# Altium PCB master.PcbDoc
Units mil, origin at the board's own origin, x right, y up, seen from the top; angles counter-clockwise.
Board outline 1530.03 x 1950.03 mil, 2 copper layers (Top Layer, Bottom Layer); 28 components, 25 nets, 143 pads, 20 vias.
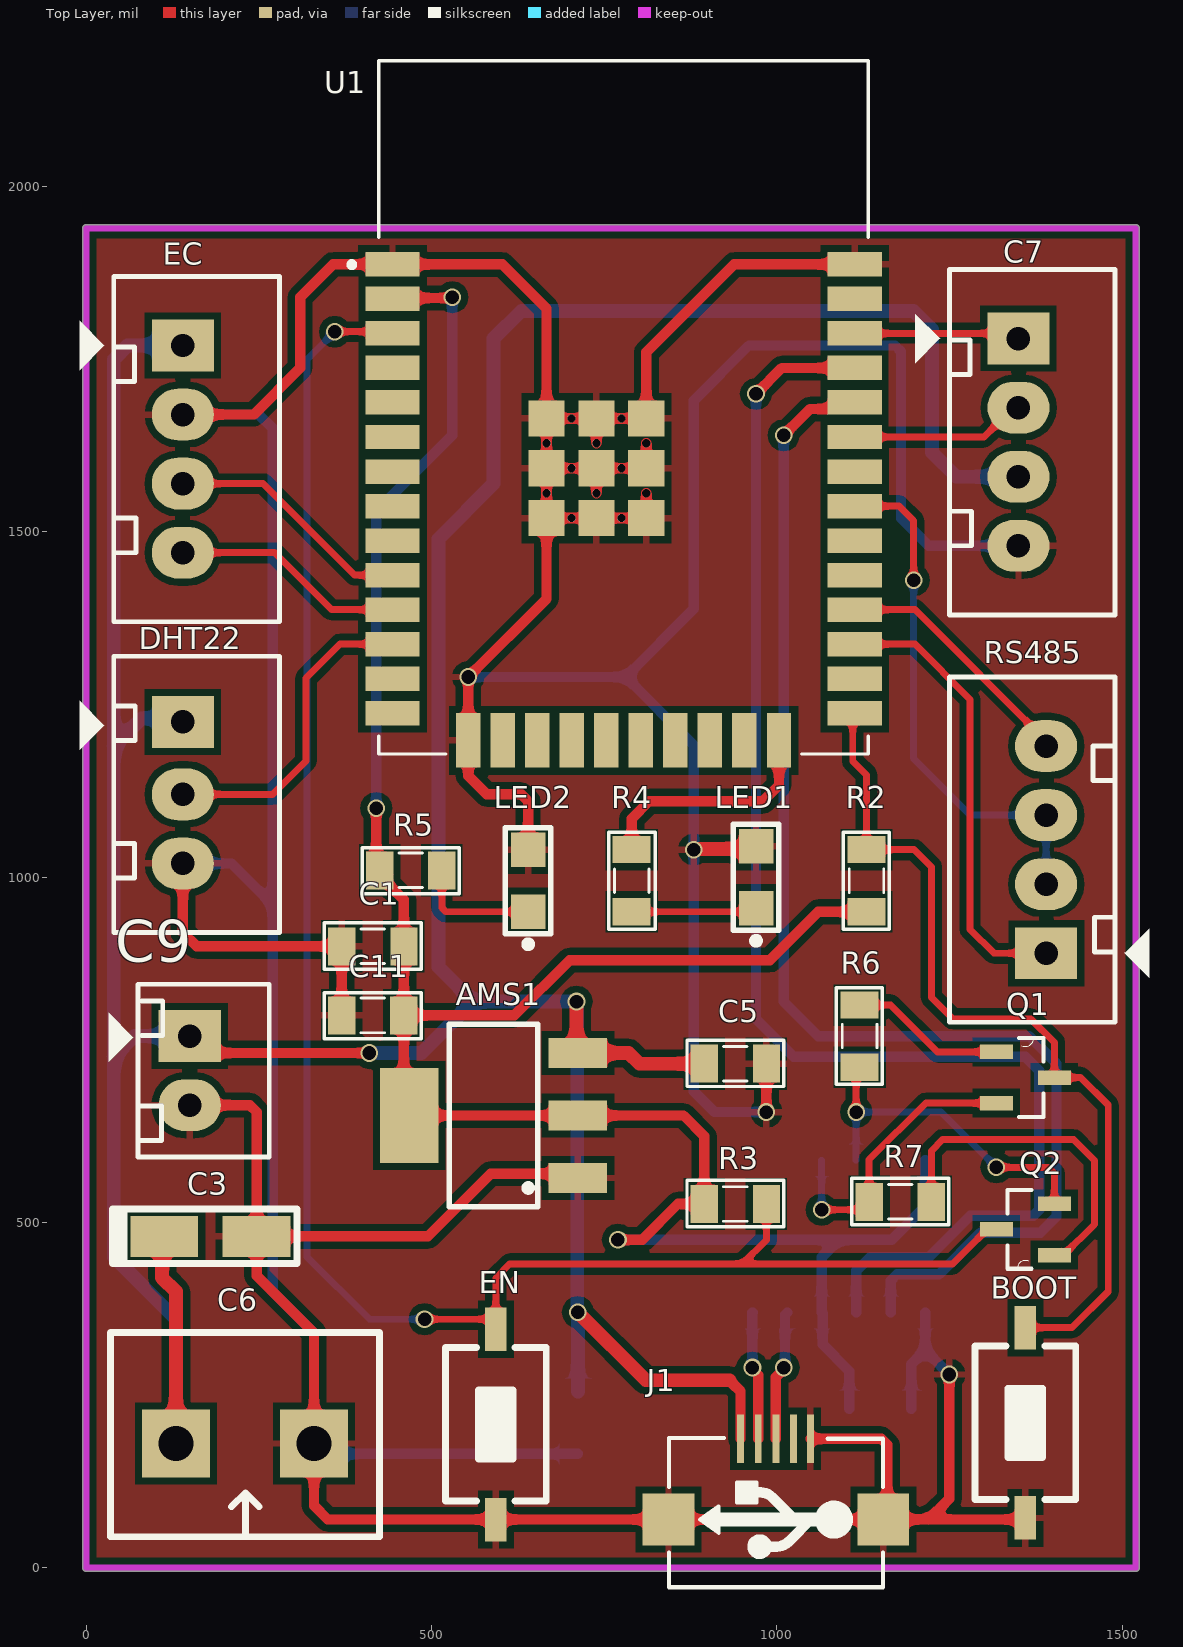
[diagram p0: Top Layer view]
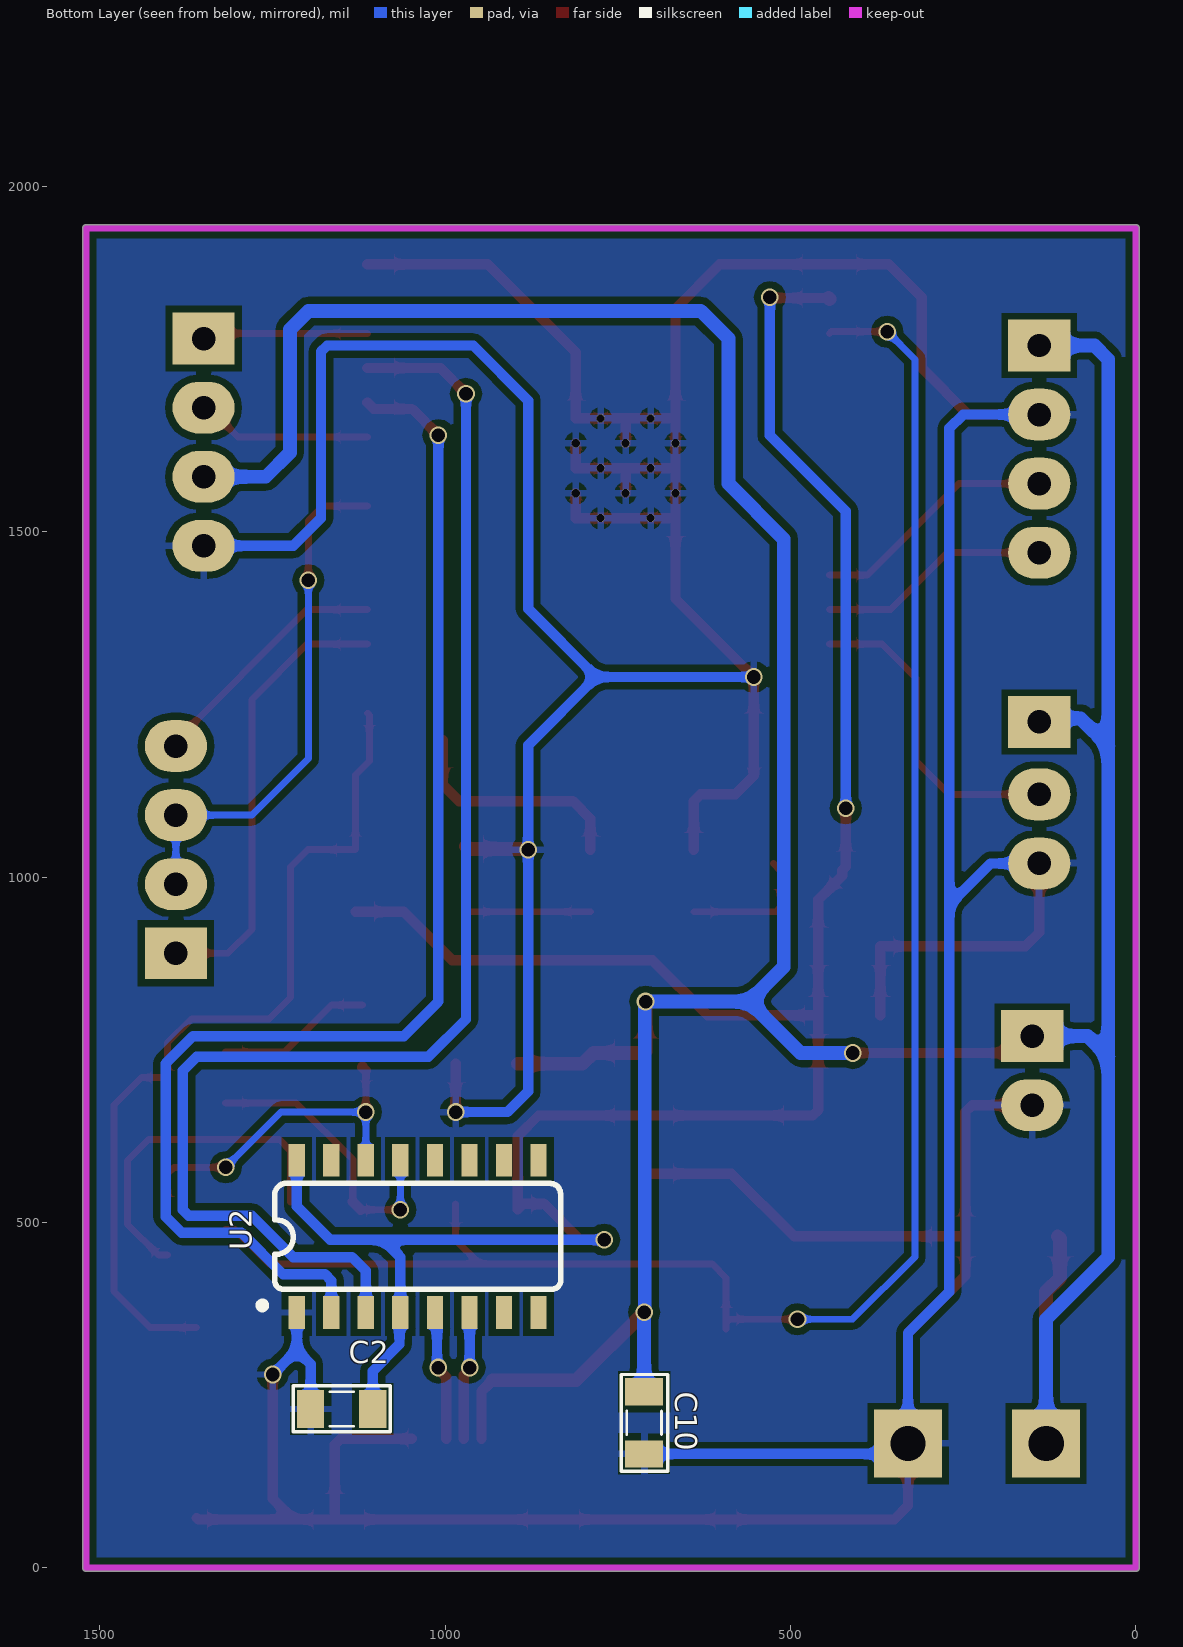
[diagram p1: Bottom Layer view, seen from below]
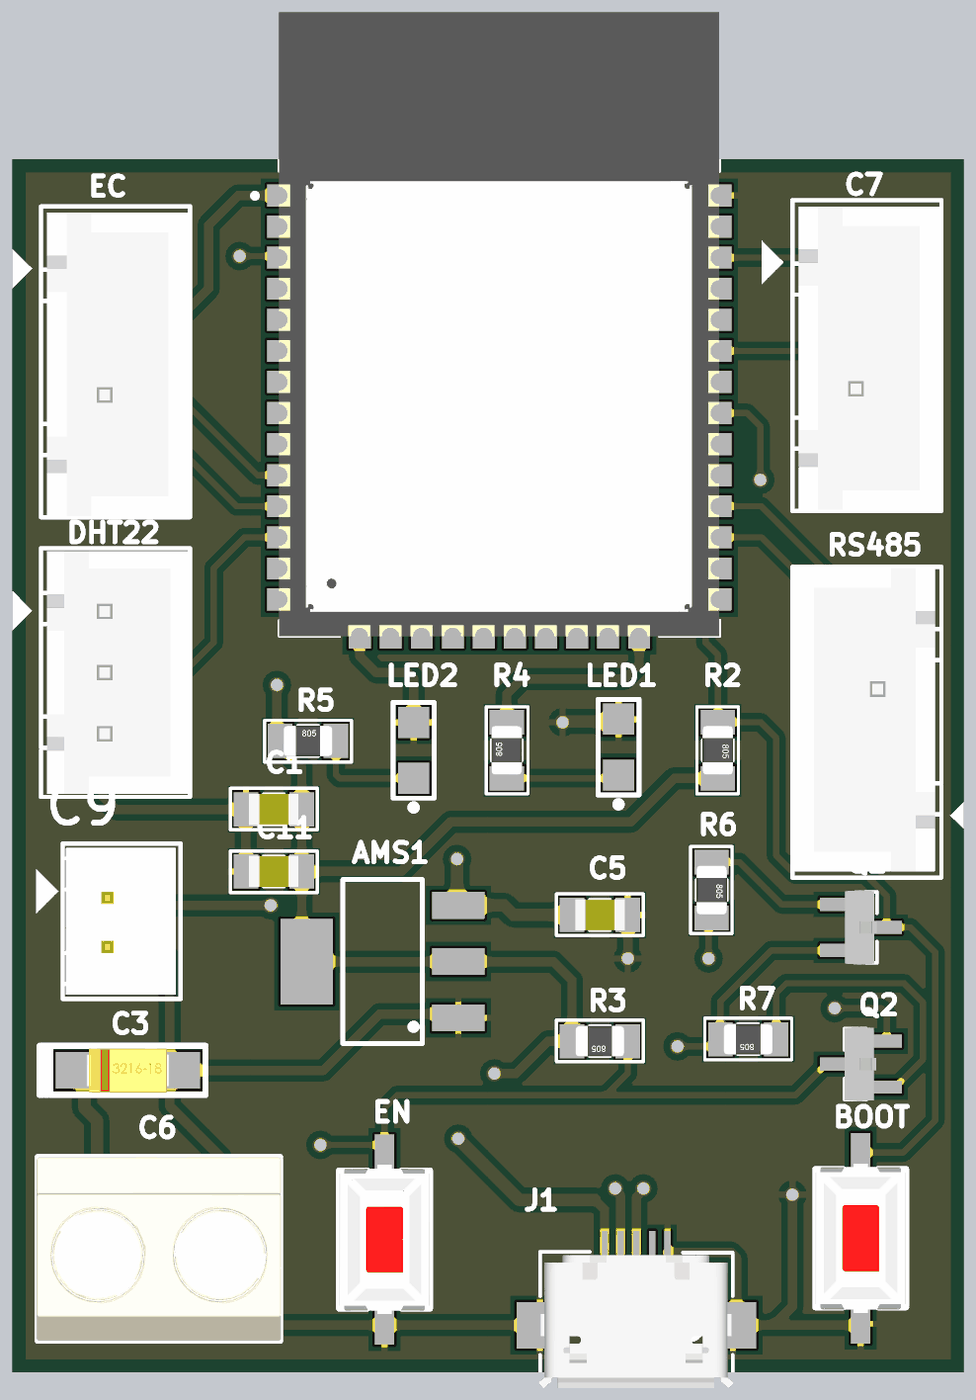
[diagram p2: 3D render of the assembled board from above, using the file's embedded part models]

## Layer stack, top to bottom
Top Solder: solder mask 0.4, Solder Resist, Dk 3.5
Top Layer: signal copper 1.4
Dielectric 1: dielectric 12.6, FR-4, Dk 4.8
Bottom Layer: signal copper 1.4
Bottom Solder: solder mask 0.4, Solder Resist, Dk 3.5

## Board outline
-5.01,0 ccw(c0,0) 0,-5.02 1520,-5.02 ccw(c1520,0) 1525.01,0 1525.01,1939.97 ccw(c1520,1940) 1525.01,1940 ccw(c1520,1940) 1520,1945.01 0,1945.01 ccw(c0,1940) -5.02,1940

## Design rules (kind name [scope] priority, off if disabled: settings)
Clearance [All] p1: gap=10 ignorepadtopadclearanceinfootprint=FALSE
DiffPairsRouting [All] p1: maxlimit=10 minlimit=10 mostfreqgap=10 toplayer_minwidth=15 toplayer_maxwidth=15 toplayer_prefwidth=15 bottomlayer_minwidth=15 bottomlayer_maxwidth=15 bottomlayer_prefwidth=15 maxuncoupledlength=500
PolygonConnect [All] p1: connectstyle=Relief reliefconductorwidth=10 reliefentries=4 polygonreliefangle="90 Angle" airgapwidth=10
RoutingVias [All] p1: holewidth=19.68 width=25.59 viastyle="Through Hole" minholewidth=19.68 minwidth=25.59 maxholewidth=19.68 maxwidth=25.59
SolderMaskExpansion [All] p1: expansion=4
Width [All] p1: maxlimit=20 minlimit=10 preferedwidth=15
29 further rules are at their usual default settings.

## Classes and differential pairs
component class "mach master": ESP32 rs485
differential pair D0: +D0_P -D0_N

## Components (designator, comment, footprint, x,y, rotation, side; value= is the part's Value field where it differs from the comment)
AMS1 "AMS1117-3.3V" SOT223 590,655 r90 top value="AMS1117-3.3V SOT223"
BOOT "SW" SW-SMD 1360,210 r270 top value="SW chip 2 pin"
C1 "100uF" CAP_0805 415,900 r180 top value=33p
C2 "10uF" CAP_0805 1150,230 r0 bottom value=33p
C3 "10uF" "tu tantalum smd3216" 180,480 r0 top
C5 "10uF" CAP_0805 940,730 r180 top value=33p
C6 "Header2" KF2-5.08 230,180 r180 top
C7 "Header4" Header4 1350,1780 r270 top
C9 "LED1" Header2 150,770 r270 top
C10 "100nF" CAP_0805 712.05,210 r90 bottom value=33p
C11 "100nF" CAP_0805 415,800 r0 top value=33p
DHT22 "J1" Header3 140,1220 r270 top value=J3
EC "C7" Header4 140,1770 r270 top
EN "SW" SW-SMD 593.25,207.8 r270 top value="SW chip 2 pin"
J1 "USB-5" USB-M1 998.76,186.84 r180 top
LED1 "LED3" LED0805 970,1000 r90 top
LED2 "LED3" LED0805 640,995 r90 top
Q1 "BC817" SOT95P240X97-3N 1360,710 r0 top
Q2 "BC817" SOT95P240X97-3N 1360,490 r180 top
R2 "10k" RES-SMD-0805 1130,995 r270 top
R3 "10k" RES-SMD-0805 940,527 r180 top
R4 "1k" RES-SMD-0805 790,995 r90 top
R5 "470" RES-SMD-0805 470,1010 r0 top
R6 "10k" RES-SMD-0805 1120,770 r270 top
R7 "10k" RES-SMD-0805 1178.84,530 r180 top
RS485 "C8" Header4 1390,890 r90 top (schematic designator rs485)
U1 "ESP32-WROOM-32" MODULE_ESP32-WROOM-32 778.25,1680.43 r0 top
U2 "CH340C" SOP-16 1040,480 r180 bottom

## Footprints (in the part's own frame and the unit in brackets; to place one, negate y for a bottom-side part, rotate by r counter-clockwise, add the part's x,y. Pads: shape width x height; smd on the part's side, far side on the other; paste and mask are expansions set on the pad)
CAP_0805 [mil]
  rect 39.37x55 smd: 1(-45,0) 2(45,0)
  silkscreen extent -70,-34 70,33, body extent -40,-25 40,25, height 24
Header2 [mil] "CON2"
  rect 75x90 hole 34: 1(0,0)
  oval 75x90 hole 34: 2(100,0)
  silkscreen extent -75,-118 175,115, body extent -68,-70 168,107, height 236
Header3 [mil] "CON 3"
  rect 75x90 hole 34: 1(-5,0)
  oval 75x90 hole 34: 2(100,0) 3(200,0)
  silkscreen extent -100,-150 300,140, body extent -95,-90 295,136, height 276
Header4 [mil] "CON4"
  rect 75x90 hole 34: 1(0,0)
  oval 75x90 hole 34: 2(100,0) 3(200,0) 4(300,0)
  silkscreen extent -100,-150 400,140, body extent -90,-90 398,136, height 276
KF2-5.08 [mm]
  rect 2.5x2.5 hole 1.3: 1(-2.54,0) 2(2.54,0)
  silkscreen extent -4.95,-4.08 4.95,3.43, body extent -5,-4.07 5,3.43, height 10
LED0805 [mil] "Chip Resistor; Body 2.0 x 1.3 mm (LxW typ)"
  rect 50x50 smd: 1(-45,0) 2(45,0)
  silkscreen extent -97,-33 77,33, body extent -60,-25 60,25, height 47
MODULE_ESP32-WROOM-32 [mm]
  rect 2x0.9 smd: 1(-8.5,5.26) 2(-8.5,3.99) 3(-8.5,2.72) 4(-8.5,1.45) 5(-8.5,0.18) 6(-8.5,-1.09) 7(-8.5,-2.36) 8(-8.5,-3.63) 9(-8.5,-4.9) 10(-8.5,-6.17) 11(-8.5,-7.44) 12(-8.5,-8.71) 13(-8.5,-9.98) 14(-8.5,-11.25) 25(8.5,-11.25) 26(8.5,-9.98) 27(8.5,-8.71) 28(8.5,-7.44) 29(8.5,-6.17) 30(8.5,-4.9) 31(8.5,-3.63) 32(8.5,-2.36) 33(8.5,-1.09) 34(8.5,0.18) 35(8.5,1.45) 36(8.5,2.72) 37(8.5,3.99) 38(8.5,5.26)
  rect 0.9x2 smd: 15(-5.715,-12.25) 16(-4.445,-12.25) 17(-3.175,-12.25) 18(-1.905,-12.25) 19(-0.635,-12.25) 20(0.635,-12.25) 21(1.905,-12.25) 22(3.175,-12.25) 23(4.445,-12.25) 24(5.715,-12.25)
  rect 1.33x1.33 smd: 39_1(-2.835,-0.405) 39_2(-1,-0.405) 39_3(0.835,-0.405) 39_4(-2.835,-2.24) 39_5(-1,-2.24) 39_6(0.835,-2.24) 39_7(-2.835,-4.075) 39_8(-1,-4.075) 39_9(0.835,-4.075)
  round 0.3 hole 0.3: 39_10(-1.917,-0.405) 39_11(-0.082,-0.405) 39_12(-2.835,-1.323) 39_13(-1,-1.323) 39_14(0.835,-1.323) 39_15(-1.917,-2.24) 39_16(-0.082,-2.24) 39_17(-2.835,-3.158) 39_18(-1,-3.158) 39_19(0.835,-3.158) 39_20(-1.917,-4.075) 39_21(-0.082,-4.075)
  silkscreen extent -10.1,-12.75 9,12.75, body extent -10.54,-12.75 8.98,12.75, height 3.2
RES-SMD-0805 [mil]
  rect 39.37x55 smd: 1(-45,0) 2(45,0)
  silkscreen extent -70,-34 70,33, body extent -39,-25 39,25, height 31
SOP-16 [mm]
  rect 0.6x1.2 smd: 1(-4.445,-2.8) 2(-3.175,-2.8) 3(-1.905,-2.8) 4(-0.635,-2.8) 5(0.635,-2.8) 6(1.905,-2.8) 7(3.175,-2.8) 8(4.445,-2.8) 9(4.445,2.8) 10(3.175,2.8) 11(1.905,2.8) 12(0.635,2.8) 13(-0.635,2.8) 14(-1.905,2.8) 15(-3.175,2.8) 16(-4.445,2.8)
  silkscreen extent -5.84,-2.67 5.26,1.95, body extent -4.95,-3.47 4.95,3.47, height 1.75
SOT95P240X97-3N [mil]
  rect 48x21 smd: 1(-42,37) 2(-42,-37) 3(42,0)
  silkscreen extent -9,-57 26,57, body extent -25,-60 26,60, height 79
SOT223 [mm] "SOT-223/SC-73; 4 Leads; Body 6.7 x 7.3 mm, inc. leads (LxW max)"
  rect 1.1x2.15 smd: 1(-2.3,-3.1) 2(0,-3.1) 3(2.3,-3.1)
  rect 3.5x2.15 smd: 4(0,3.1)
  silkscreen extent -3.35,-1.62 3.35,1.62, body extent -3.43,-1.65 3.43,1.65, height 2.54
SW-SMD [mm] "Switch SMD type"
  rect 1.6x0.8 smd: 1(-3.5,0) 2(3.5,0)
  silkscreen extent -2.82,-1.85 2.82,1.85, body extent -3.05,-1.85 3.05,1.85, height 2.5
"tu tantalum smd3216" [mm]
  rect 2.5x1.5 smd: 1(-1.7,0) 2(1.7,0)
  silkscreen extent -3.61,-1 3.17,1, body extent -1.7,-0.9 1.7,0.9, height 1.69
USB-M1 [mil]
  rect 10x70 smd: 1(51.18,0) 2(25.59,0) 3(0,0) 4(-25.59,0) 5(-50,0)
  rect 74.8x74.8 smd: 5(-155.51,116.84) 5(155.51,116.84)
  silkscreen extent -155,-1 155,215, body extent -157,5 158,218, height 107

## Part data
AMS1: library part "AMS1117 SMD", "D醤", Chung_Loai=D醤, Don_Vi=Con, Ma_Hang=MH000596
BOOT EN: library part SW2, "Switch button 2 pin"
C1 C2 C5 C10 C11: library part CapSMD, "Capacitor", LatestRevisionDate=17-Jul-2002, LatestRevisionNote="Re-released for DXP Platform.", PackageReference=RAD-0.3, Published=8-Jun-2000, Publisher="Altium Limited"
C3: library part "Tu tantalum 10uF 16V SMD3216", "D醤", Chung_Loai=D醤, Don_Vi=Con, Ma_Hang=MH001954, So_Chan=2, Ten_Linh_Kien="T? tantalum 106C-10uF 16V SMD3216"
C6: "Header IDC, 2 x 1 Pin Vertical 2.54mm Pitch (Non-Boxed, Male)", Manufacturer="Würth Elektronik eiSos GmbH", partNo=613002143121, ComponentLink1 Description=Manufacturer, ComponentLink1URL=http://www.we-online.com, ComponentLink2 Description=Datasheet, ComponentLink2URL=http://katalog.we-online.de/em/datasheet/6130xx143121.pdf, Created by="Karrer Zheng", Created Date="29 March 2013", NoPins=02
C7: "Header IDC, 4 x 1 Pin Vertical 2.54mm Pitch (Non-Boxed, Male)", Manufacturer="Würth Elektronik eiSos GmbH", partNo=613002143121, ComponentLink1 Description=Manufacturer, ComponentLink1URL=http://www.we-online.com, ComponentLink2 Description=Datasheet, ComponentLink2URL=http://katalog.we-online.de/em/datasheet/6130xx143121.pdf, Created by="Karrer Zheng", Created Date="29 March 2013", NoPins=02
C9: library part Header2, "Header IDC, 2 x 1 Pin Vertical 2.54mm Pitch (Non-Boxed, Male)", Manufacturer="Würth Elektronik eiSos GmbH", partNo=613002143121, ComponentLink1 Description=Manufacturer, ComponentLink1URL=http://www.we-online.com, ComponentLink2 Description=Datasheet, ComponentLink2URL=http://katalog.we-online.de/em/datasheet/6130xx143121.pdf, Created by="Karrer Zheng", Created Date="29 March 2013", NoPins=02
DHT22: library part JP3, "Jumper 3"
EC RS485: library part JP4, "WR-PHD 2.54 mm Angled Socket Header", Manufacturer="Würth Elektronik eiSos GmbH", partNo=613004143121, ComponentLink1 Description=Manufacturer, ComponentLink1URL=http://www.we-online.com, ComponentLink2 Description=Datasheet, ComponentLink2URL=http://katalog.we-online.de/em/datasheet/6130xx143121.pdf, Created by="Karrer Zheng", Created Date="29 March 2013", NoPins=04
J1: Manufacturer=FCI, Manufacturer Part Number=10118193-0001LF, Supplier Part Number 1=609-4616-1-ND, .Checked PCB=RF, .Checked SCH=MM, .Creator=MM, Category="Connectors, Interconnects", ComponentLink1Description=http://portal.fciconnect.com/Comergent//fci/drawing/10118193.pdf, ComponentLink1URL=http://portal.fciconnect.com/Comergent//fci/drawing/10118193.pdf, Connector Type="USB - micro B", Features="Shielded, Solder Retention", Gender=Receptacle, Ingress Protection=-, Mounting Type="Surface Mount, Right Angle, Horizontal", Number of Contacts=5, Packaging="Cut Tape (CT)", Pricing 1="1=0.46, 10=0.433, 25=0.3712, 50=0.3156, 100=0.3032, 250=0.27224, 500=0.25988 (USD)", RoHS="RoHS Compliant", Specifications="USB 2.0", Stock 1=28642, Supplier 1=Digi-Key
LED1 LED2: library part LED0805, "LED SMD 0805"
Q1 Q2: "Bipolar (BJT) Transistor NPN 45V 500mA 100MHz 250mW Surface Mount TO-236AB", Package="SOT-23-3 Rectron", Availability="In Stock", Check_prices=https://www.snapeda.com/parts/BC817/Rectron/view-part/?ref=eda, MF=Rectron, MP=BC817, Price=None, Purchase-URL=https://pricing.snapeda.com/search/part/BC817/?ref=eda, SnapEDA_Link=https://www.snapeda.com/parts/BC817/Rectron/view-part/?ref=snap
R2 R3 R4 R6 R7: library part "Resistor - SMD", "Resistor", Manufacturer="Generic Components", Class=Passive, Published=08/06/2000, Publisher="Altium Hobart Technology Centre"
R5: library part "Resistor - SMD", "22", Manufacturer="Generic Components", Class=Passive, Published=08/06/2000, Publisher="Altium Hobart Technology Centre"
U1: "Bluetooth, WiFi 802.11b/g/n, Bluetooth v4.2 +EDR, Class 1, 2 and 3 Transceiver Module 2.4GHz ~ 2.5GHz Antenna Not Included, U.FL Surface Mount", Package="Module Espressif Systems", Availability="In Stock", Check_prices=https://www.snapeda.com/parts/ESP32-WROOM-32/Espressif+Systems/view-part/?ref=eda, MF="Espressif Systems", MP=ESP32-WROOM-32, Price=None, Purchase-URL=https://pricing.snapeda.com/search/part/ESP32-WROOM-32/?ref=eda, SnapEDA_Link=https://www.snapeda.com/parts/ESP32-WROOM-32/Espressif+Systems/view-part/?ref=snap
U2: "USB to serial chip CH340", Package=Package, Availability=Unavailable, Check_prices=https://www.snapeda.com/parts/CH340C/WCH/view-part/5428851/?ref=eda, MF=WCH, MP=CH340C, Price=None, SnapEDA_Link=https://www.snapeda.com/parts/CH340C/WCH/view-part/5428851/?ref=snap

## Via types
v1: diameter 25.59, hole 19.68, Top Layer to Bottom Layer, tented both sides, 20 vias

## Nets (pads, with @x,y where several pads share a name; then routed paths per layer and width w, separated by ;. In a path a pad name is that pad's centre, name@x,y a point inside that pad or via, vN(x,y) a via of type N, cw(c..) or ccw(c..) an arc to the next point about the centre after c; other vN are vias at no path point)
3V3: AMS1.2 AMS1.4 C1.1 C2.1 C11.2 R2.2 R3.2 R5.1 U1.2 U2.4 U2.16 | length 3559
  Top Layer w15: v1(420,1100) 420,1015 R5.1 425,1002.19 460,967.18 C1.1 C11.2 ; U1.2@445.01,1838.93 445.18,1838.76 528.76,1838.76 v1(530,1840) ; v1(770,475) 805,475 857,527 887.19,527 895,519.19 R3.2 895,625 865,655 AMS1.2 AMS1.4 460,662.95 C11.2 ; R2.2 1060,950 990,880 700,880 620,800 C11.2
  Top Layer w20: U1.2 U1.2@445.01,1838.93
  Bottom Layer w15: v1@420,1110 420,1530 530,1640 v1(530,1840) ; v1(770,475) 1090,475 ; C2.1 1105,285 1066.36,323.64 1066.36,368.41 U2.4 1065,450 1090,475 ; U2.16 1215,523.43 1166.57,475 1090,475
A0: EC.4 U1.11 | length 337.8
  Top Layer w10: EC.4 272.52,1470 355,1387.52 U1.11
CH340_RX: U1.35 U2.3 | length 2068.4
  Top Layer w15: v1(970,1700) 1007.52,1737.52 U1.35
  Bottom Layer w15: v1@969.7,1699.7 v1(970,1700) 970,794.64 1024.64,740 1360,740 1380,720 1380,518.79 1371.21,510 1280,510 1220,450 1135,450 1115,430 U2.3
CH340_TX: U1.34 U2.2 | length 1921.1
  Top Layer w15: v1(1010,1640) 1048.16,1678.16 1103.53,1678.16 U1.34
  Bottom Layer w15: v1(1010,1640) 1010,820 1060,770 1365.36,770 1405,730.36 1405,508.43 1381.57,485 1295,485 1235,425 1174.11,425 1165,415.89 U2.2
D0_N: J1.2 U2.6 | length 186.5
  Top Layer w15: v1(964.76,290) 964.76,287.13 973.17,278.73 J1.2
  Bottom Layer w15: v1(964.76,290) 964.76,369.53 U2.6
D0_P: J1.3 U2.5 | length 189.6
  Top Layer w15: J1.3 998.76,275.89 1010,287.13 v1(1010,290)
  Bottom Layer w15: v1(1010,290) 1012.03,292.03 1012.03,366.79 U2.5
DATA: DHT22.2 U1.12 | length 464
  Top Layer w10: DHT22.2 270,1120 318.23,1168.23 318.23,1288.23 367.52,1337.52 U1.12
EN: EN.1 Q2.3 R3.1 U1.3 | length 2683.8
  Top Layer w10: v1(360,1790) 441.12,1790 U1.3 ; v1(490,360) 587.5,360 EN.1@593.25,354.25 ; EN.1 EN.1@593.25,354.25 ; R3.1 985,475 950,440 ; Q2.3 1304.5,490 1254.5,440 950,440 ; EN.1@593.25,354.25 593.25,420 613.25,440 950,440
  Bottom Layer w10: v1(360,1790) 320,1750 320,450 410,360 v1(490,360)
GND: AMS1.1 BOOT.2 C1.2 C2.2 C3.2 C5.1 C6.1 C7.4 C9.2 C10.1 C11.1 DHT22.3 EC.2 EN.2 J1.5 LED1.2 LED2.2 U1.1 U1.15 U1.38 U1.39_1 U1.39_2 U1.39_3 U1.39_4 U1.39_5 U1.39_6 U1.39_7 U1.39_8 U1.39_9 U1.39_10 U1.39_11 U1.39_12 U1.39_13 U1.39_14 U1.39_15 U1.39_16 U1.39_17 U1.39_18 U1.39_19 U1.39_20 U1.39_21 U2.1 | length 10490.8
  Top Layer w15: DHT22.3 140,920 160,900 C1.2 C11.1 ; EC.2 242.48,1670 310,1737.52 310,1840 357.52,1887.52 U1.1 602.48,1887.52 666.63,1823.37 U1.39_1 ; C9.2 237,670 246.93,660.07 C3.2 ; LED2.2 640,1110 630,1120 580,1120 553.25,1146.75 U1.15 v1(553.25,1290) 666.63,1403.39 U1.39_7 ; AMS1.1 705.72,570.78 585.77,570.78 495,480 C3.2 ; U1.39_18 U1.39_5 ; U1.39_13 U1.39_2 ; U1.39_19 U1.39_9 U1.39_21 U1.39_8 U1.39_20 U1.39_7 ; U1.39_14 U1.39_6 U1.39_16 U1.39_5 ; v1(985,660) C5.1 ; J1.5@1048.76,186.84 1151.21,186.84 1160,178.06 1160,75.73 J1.5@1154.27,70 ; U1.38 938.64,1887.52 811.12,1760 U1.39_3 U1.39_11 U1.39_2 ; v1(1250,280) 1250,100 1220,70 ; BOOT.2 1357.8,70 1220,70 ; C3.2 246.93,423.07 330,340 C6.1 330,90 350,70 EN.2 843.25,70 J1.5@1154.27,70 ; U1.39_7 U1.39_17 U1.39_4 ; U1.39_4 U1.39_15 U1.39_5 ; U1.39_4 U1.39_12 U1.39_1 ; U1.39_1 U1.39_10 U1.39_2 ; J1.5@1154.27,70 1220,70
  Top Layer w20: v1(880,1040) 881.07,1041.07 966.07,1041.07 LED1.2
  Bottom Layer w15: DHT22.3 210,1020 270,960 ; EC.2 250,1670 270,1650 270,960 ; v1(553.25,1290) 781.12,1290 ; C10.1 345,165 C6.1 330,340 270,400 270,960 ; v1(985,660) 910,660 880,690 v1(880,1040) 880,1191.12 781.12,1290 ; C2.2 1195,295 1215,315 ; U2.1 1215,315 ; v1(1250,280) 1215,315 ; C7.4 1220,1480 1180,1520 1180,1761.21 1171.21,1770 959.7,1770 880,1690.3 880,1388.88 781.12,1290
IO2: R4.2 U1.24 | length 343.1
  Top Layer w15: R4.2 790,1085 815,1110 980,1110 1003.25,1133.25 U1.24
IO_0: BOOT.1 Q1.3 R2.1 U1.25 | length 1262.2
  Top Layer w10: U1.25 1110,1234.63 1110,1168.23 1130,1148.23 R2.1 1198.84,1040 1223.84,1015 1223.84,826.16 1255,795 1367.77,795 1402,760.78 Q1.3 1440,710 1480,670 1480,400 1427.8,347.8 BOOT.1
NetLED1_1: LED1.1 R4.1 | length 182.1
  Top Layer w10: R4.1 965,950 LED1.1
NetLED2_1: LED2.1 R5.2 | length 195.7
  Top Layer w10: R5.2@525,1020 R5.2 515,955.86 520.86,950 LED2.1
NetQ1_1: Q1.1 R6.1 | length 226.2
  Top Layer w10: R6.1 1165,815 1233,747 Q1.1
NetQ1_2: Q1.2 R7.2 U2.13 | length 427.3
  Top Layer w10: v1(1065,518.55) R7.2@1122.39,518.55 ; R7.2 1133.84,590.99 1215.86,673 Q1.2
  Top Layer w15: v1(1065,518.55) v1@1067.03,520.58 ; R7.2@1122.39,518.55 R7.2
  Bottom Layer w10: v1(1065,518.55) U2.13
NetQ2_1: Q2.1 R7.1 | length 498.1
  Top Layer w10: R7.1 1223.84,603.84 1240,620 1430,620 1460,590 1460,497.5 1415.5,453 Q2.1
NetQ2_2: Q2.2 R6.2 U2.14 | length 504.6
  Top Layer w10: v1(1115,660) R6.2@1115,720 ; v1(1318,580) 1392.77,580 1402,570.78 Q2.2
  Top Layer w15: R6.2@1115,720 R6.2
  Bottom Layer w10: U2.14 v1(1115,660) 1238,660 v1(1318,580)
RD0: U1.30
RD1: RS485.2 RS485.3 U1.31 | length 764.3
  Top Layer w10: U1.31 1177.05,1537.52 1198.28,1516.29 v1(1198.28,1430)
  Bottom Layer w10: v1(1198.28,1430) 1198.28,1171.72 1280,1090 RS485.3 RS485.2
RX1: RS485.1 U1.27 | length 657.6
  Top Layer w10: U1.27 1200,1337.52 1280,1257.52 1280,924.5 1314.5,890 RS485.1
SCL: C7.1 U1.36 | length 240.2
  Top Layer w10: U1.36 1342.48,1787.52 C7.1
SDA: C7.2 U1.33 | length 254.7
  Top Layer w10: U1.33 1300.02,1637.52 1342.5,1680 C7.2
T0: EC.3 U1.10 | length 358.5
  Top Layer w10: EC.3 256.12,1570 388.6,1437.52 U1.10
TX1: RS485.4 U1.28 | length 363.3
  Top Layer w10: U1.28 1200,1387.52 1390,1197.52 RS485.4
VCC: AMS1.3 C3.1 C5.2 C6.2 C7.3 C9.1 C10.2 DHT22.1 EC.1 J1.1 | length 6074.4
  Top Layer w15: C9.1 174.45,745.55 v1(410,745.55) ; 931.62,271.62 947.58,255.67 J1.1
  Top Layer w20: C3.1 110,476.93 110,420 130,400 C6.2 C6.2@143.07,193.07 ; v1(710,820) 710,747.6 AMS1.3 785.57,745.55 801.12,730 C5.2 ; v1(712.05,370) 810.42,271.62 931.62,271.62
  Bottom Layer w20: C6.2 130,360 40,450 40,740 ; DHT22.1 135,1230 80,1230 40,1190 ; EC.1 60,1770 40,1750 40,1190 ; EC.1@141,1780 EC.1@141,1792.24 ; C9.1 70,770 40,740 ; v1(410,745.55) 485.55,745.55 560,820 ; C10.2 v1(712.05,370) 711.02,371.02 711.02,818.98 v1(710,820) 560,820 ; C7.3 1260,1580 1225,1615 1225,1793.28 1198.28,1820 630,1820 590,1780 590,1570 510,1490 510,870 560,820 ; 40,740 40,1190
pads on no net: J1.4 U1.4 U1.5 U1.6 U1.7 U1.8 U1.9 U1.13 U1.14 U1.16 U1.17 U1.18 U1.19 U1.20 U1.21 U1.22 U1.23 U1.26 U1.29 U1.32 U1.37 U2.7 U2.8 U2.9 U2.10 U2.11 U2.12 U2.15

## Polygon pours and split planes (outlines as drawn)
GND on Bottom Layer "GND_L02_P032" (solid, pour order 32): 0,0 0,1940 1520,1940 1520,0
GND on Bottom Layer "GND_L02_P002" (solid, pour order 2): 0,2010
GND on Top Layer "GND_L01_P034" (solid, pour order 34): 1520,0 1520,1940 0,1940 0,0
GND on Top Layer "GND_L01_P030" (solid, pour order 30): 0,0
no net on Top Layer "NONET_L01_P012" (solid, pour order 12): 0,2010

## Keep-outs
Keep-Out Layer:
  lines w10: 0,0 1520,0 1520,1940 1230,1940 310,1940 0,1940 0,0

## Text inside footprints (layer, text, board x,y; h text height)
U1: Mechanical 13 "ANTENNA" at 542.03,2034.76 h70